# Altium PCB PCB4.PcbDoc
Units mm, origin at the board's own origin, x right, y up, seen from the top; angles counter-clockwise.
Board outline 40 x 20 mm, 2 copper layers (Top Layer, Bottom Layer); 17 components, 13 nets, 57 pads, 1 vias.
Unrouted connection lines stored in the file: 4.
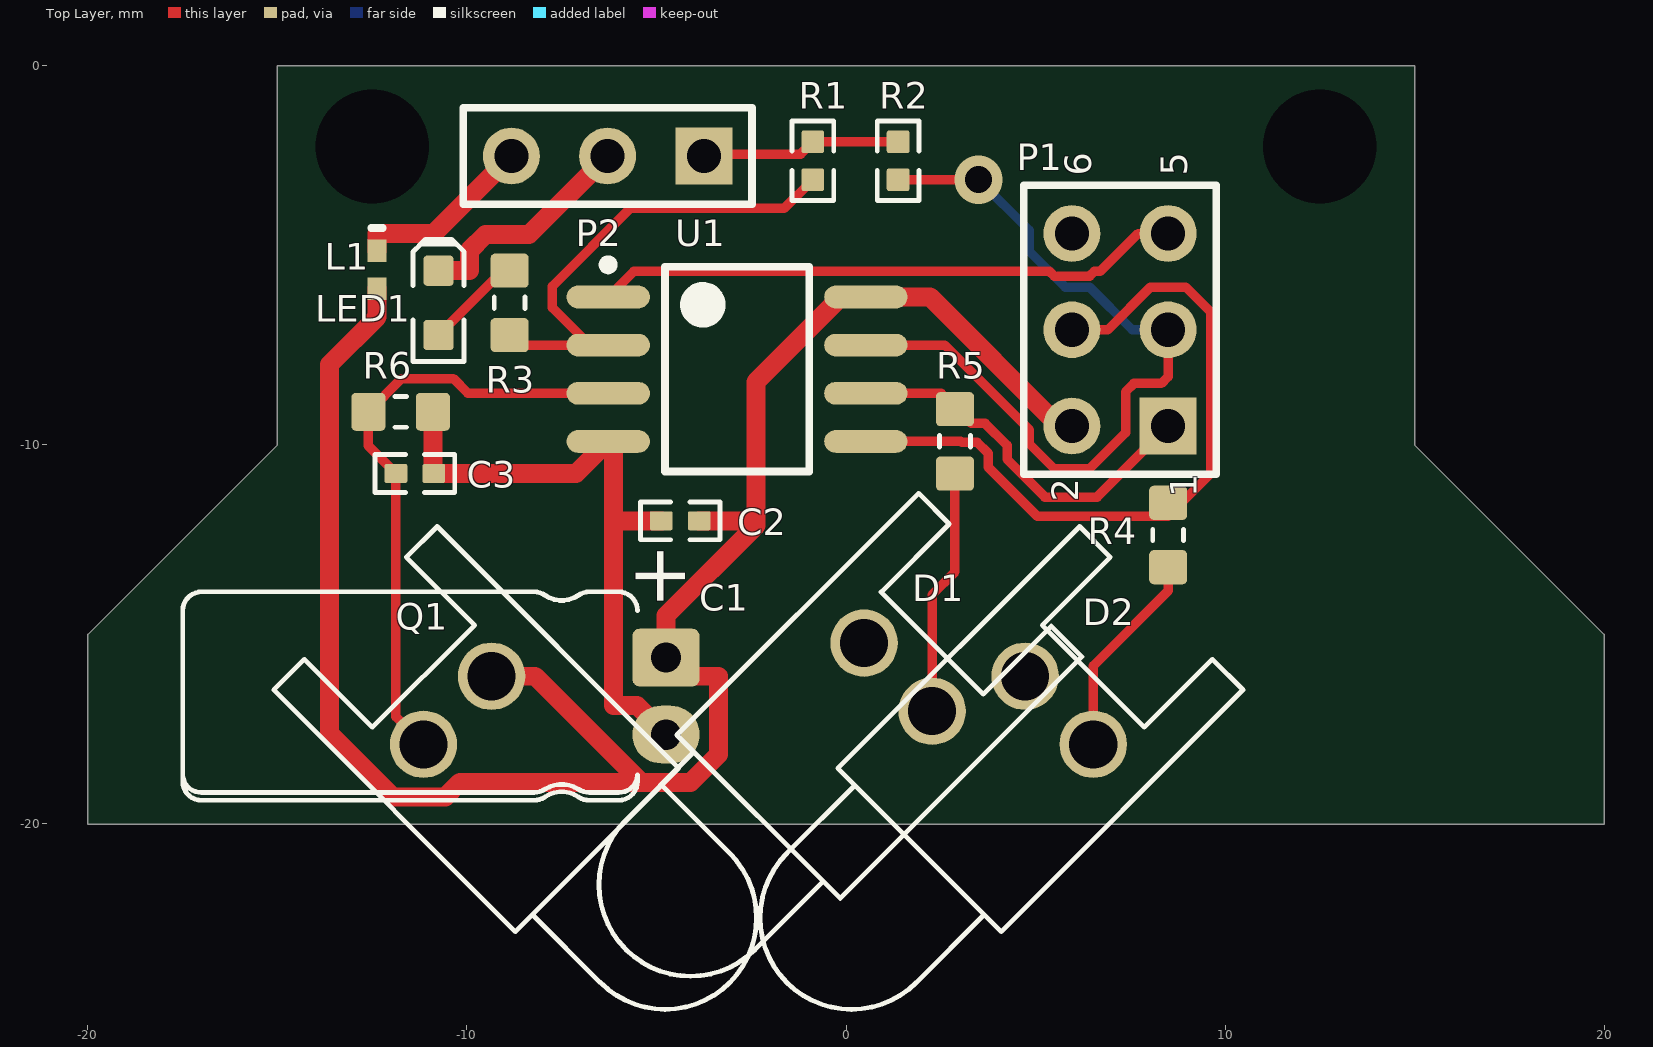
[diagram p0: Top Layer view]
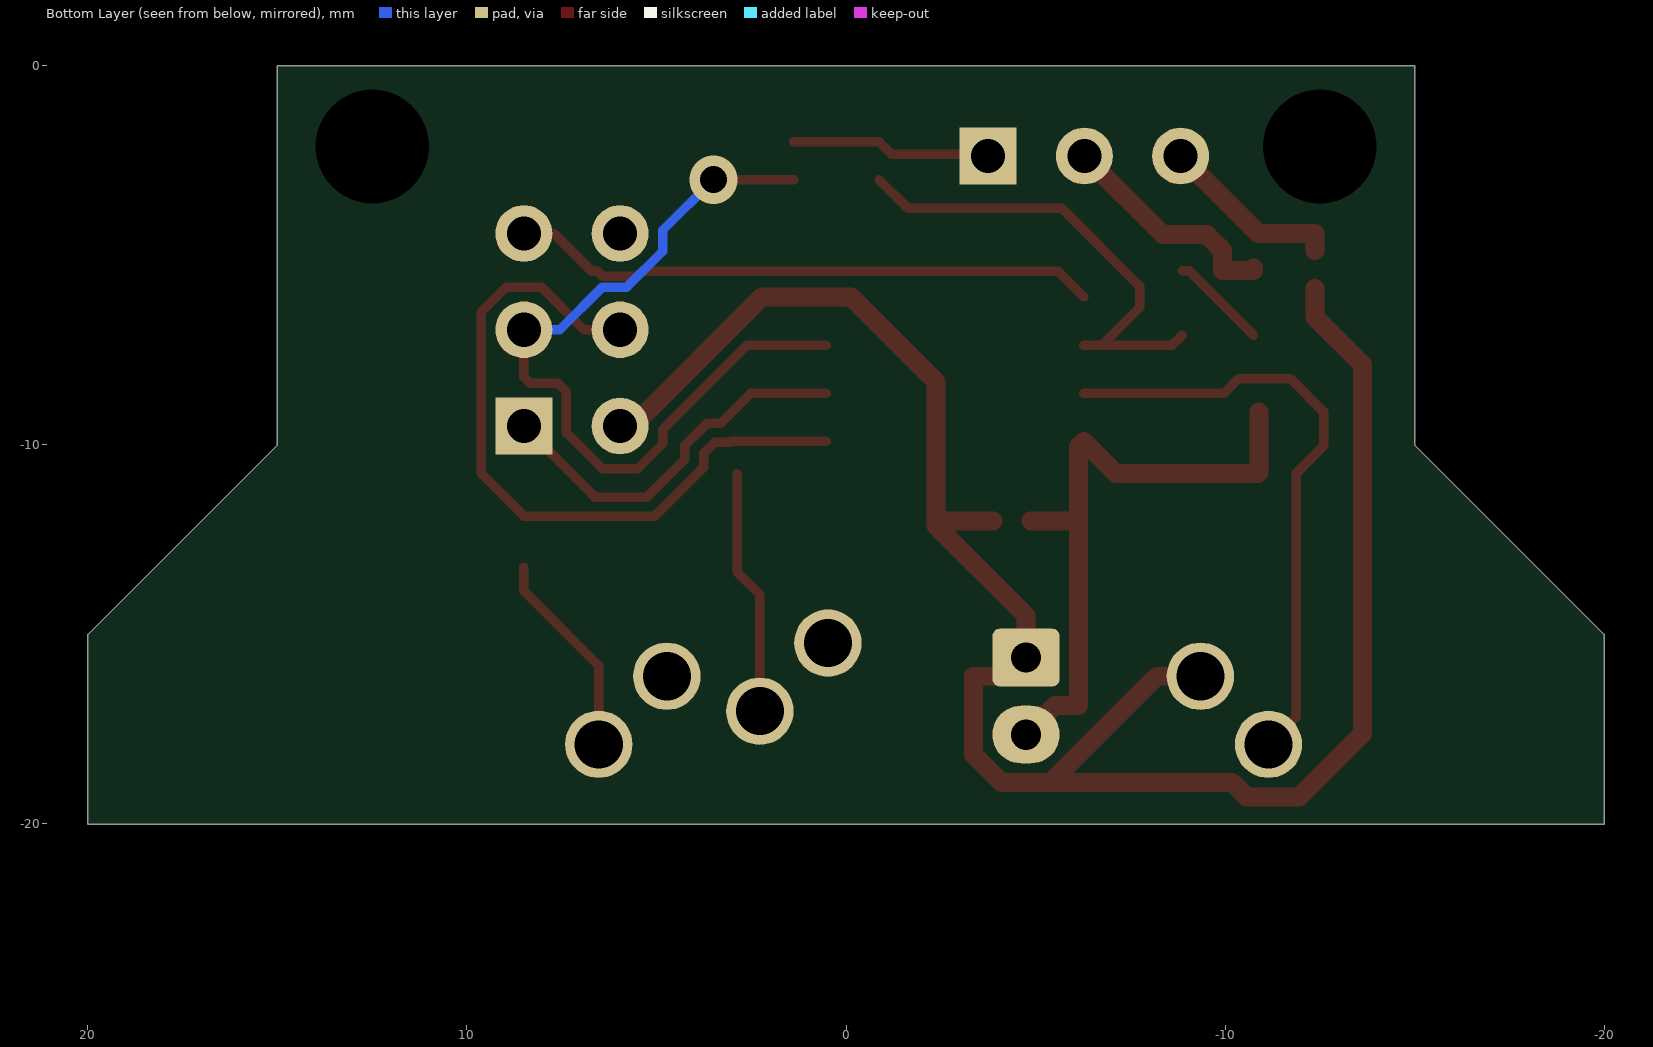
[diagram p1: Bottom Layer view, seen from below]
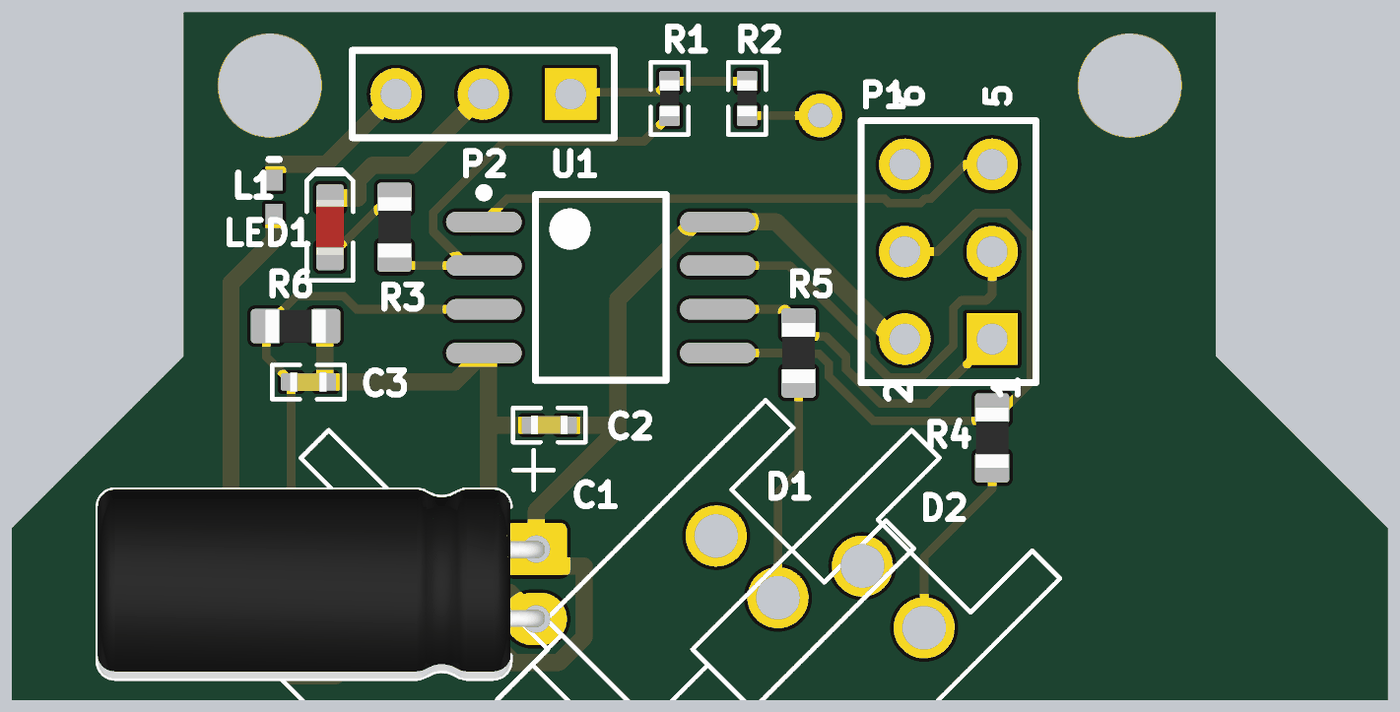
[diagram p2: 3D render of the assembled board from above, using the file's embedded part models]

## Layer stack, top to bottom
Top Solder: solder mask 0.0102, Solder Resist, Dk 3.5
Top Layer: signal copper 0.0356
Dielectric1: dielectric 0.32, FR-4, Dk 4.8
Bottom Layer: signal copper 0.0356
Bottom Solder: solder mask 0.0102, Solder Resist, Dk 3.5

## Board outline
-15,0 15,0 15,-10 20,-15 20,-20 -20,-20 -20,-15 -15,-10 -15,0

## Design rules (kind name [scope] priority, off if disabled: settings)
Clearance [All] p1: gap=0.25
FabricationTestPointUsage TestPointUsage [All] p1: valid=0 allowmultiple=FALSE
FabricationTestpoint Testpoint [All] p1: side=3 testpointundercomponent=TRUE minsize=1.016 maxsize=2.54 preferedsize=1.524 minholesize=0 maxholesize=1.016 preferedholesize=0.813 testpointgrid=0.025 allowsidetop=TRUE allowsidebottom=TRUE usegrid=TRUE gridtolerance=0
PolygonConnect [All] p1: connectstyle=Relief reliefconductorwidth=0.254 reliefentries=4 polygonreliefangle="90 Angle" airgapwidth=0.254
RoutingVias [All] p1: holewidth=0.6 width=1 viastyle="Through Hole" minholewidth=0.6 minwidth=1 maxholewidth=0.6 maxwidth=1
SilkToSolderMaskClearance SilkscreenOverComponentPads [IsPad] p1: minsilkscreentomaskgap=0.254 clearancetoexposedcopper=TRUE
SolderMaskExpansion [All] p1: expansion=0.102
Width Width_Power [(InNet('5V') OR InNet('GND') OR InNet('VCC'))] p1: maxlimit=0.5 minlimit=0.25 preferedwidth=0.5 minimp=50.000000 maximp=50.000000 favimp=50.000000
Width [All] p2: maxlimit=0.25 minlimit=0.2 preferedwidth=0.25 minimp=50.000000 maximp=50.000000 favimp=50.000000
27 further rules are at their usual default settings.

## Components (designator, comment, footprint, x,y, rotation, side; value= is the part's Value field where it differs from the comment)
C1 "100µ" CAPAE200P550X1200_FLAT2 -4.75,-16.625 r90 top
C2 "100n" CAPC1005X55N -4.375,-12 r0 top
C3 "1n" CAPC1005X55N -11.375,-10.75 r0 top
D1 "GL480E" LED-0 1.375,-16.125 r315 top
D2 "GL480E" LED-0 5.625,-17 r315 top
L1 "Inductor" 0402-A -12.375,-5.375 r270 top
LED1 "Red" LED-0603-RED -10.75,-6.25 r90 top
P1 "ICSP" HDR2X3 8.5,-9.5 r90 top
P2 "Header 3" HDR1X3 -3.75,-2.375 r180 top
Q1 "SFH3100F" LED-0 -10.25,-17 r45 top
R1 "Thick Film" RESC1005X40N -0.875,-2.5 r90 top
R2 "Thick Film" RESC1005X40N 1.375,-2.5 r90 top
R3 "Thick Film" RESC1608X55N -8.875,-6.25 r90 top
R4 "Thick Film" RESC1608X55N 8.5,-12.375 r90 top
R5 "Thick Film" RESC1608X55N 2.875,-9.905 r90 top
R6 "Thick Film" RESC1608X55N -11.75,-9.125 r180 top
U1 "ATtiny45-20SH" 8S2_N -2.875,-8 r0 top

## Footprints (in the part's own frame and the unit in brackets; to place one, negate y for a bottom-side part, rotate by r counter-clockwise, add the part's x,y. Pads: shape width x height; smd on the part's side, far side on the other; paste and mask are expansions set on the pad)
8S2_N [mm] "SOP, 8-Leads, Body 5.3x5.3mm, Pitch 1.27mm, IPC Medium Density"
  oval 2.2x0.6 smd: 1(-3.4,1.905) 2(-3.4,0.635) 3(-3.4,-0.635) 4(-3.4,-1.905) 5(3.4,-1.905) 6(3.4,-0.635) 7(3.4,0.635) 8(3.4,1.905)
  silkscreen extent -3.52,-2.7 1.9,2.88, body extent -2.7,-2.68 2.7,2.68, height 2.16
0402-A [mm] "Chip Inductor, Body 1.0x0.5mm, IPC High Density"
  rect 0.6x0.5 smd: 1(-0.5,0) 2(0.5,0)
  silkscreen extent -1.1,-0.15 -1.1,0.15, body extent -0.55,-0.3 0.55,0.3, height 0.55
CAPAE200P550X1200_FLAT2 [mil]
  round 20 on Mech15: 0(0,0)
  rrect25% 60x70 hole 31.5: 1(40,0)
  oval 60x70 hole 31.5: 2(-40,0)
  silkscreen extent -108,30 108,502, body extent -107,-10 107,502, height 216
CAPC1005X55N [mm] "Chip Capacitor, Body 1.0x0.5mm, EIA 0402, IPC Medium Density"
  round 0.2 on Mech15: 0(0,0)
  rrect20% 0.6x0.5 smd: 1(-0.5,0) 2(0.5,0)
  Top Layer pour cut-out: -0.325,0.375 -0.2,0.5 0.2,0.5 0.325,0.375 0.325,-0.375 0.2,-0.5 -0.2,-0.5 -0.325,-0.375
  silkscreen extent -1.05,-0.5 1.05,0.5, body extent -0.52,-0.27 0.53,0.28, height 0.55
HDR1X3 [mm] "Connector; Header; 3 Position"
  rect 1.5x1.5 hole 0.9: 1(0,0)
  round 1.5 hole 0.9: 2(2.54,0) 3(5.08,0)
  silkscreen extent -1.27,-1.27 6.35,1.27
HDR2X3 [mm] "Connector; Header; 3x2 Position"
  rect 1.5x1.5 hole 0.9: 1(0,0)
  round 1.5 hole 0.9: 2(0,2.54) 3(2.54,0) 4(2.54,2.54) 5(5.08,0) 6(5.08,2.54)
  silkscreen extent -1.27,-1.27 6.35,3.81
LED-0 [mil] "LED; 2 Leads"
  round 70 hole 50: 1(50,0) 2(-50,0)
  silkscreen extent -120,-400 120,150
LED-0603-RED [mm]
  round 0.254 on Mech15: 0(0,0)
  rrect25% 0.8x0.8 smd: A(-0.85,0) K(0.85,0)
  Top Layer pour cut-out: -0.5,0.5 0.5,0.5 0.5,-0.5 -0.5,-0.5
  silkscreen extent -1.55,-0.67 1.68,0.67, body extent -0.8,-0.4 0.8,0.4, height 0.75
RESC1005X40N [mm] "Chip Resistor, Body 1.0x0.5mm, EIA 0402, IPC Medium Density"
  round 0.2 on Mech15: 0(0,0)
  rrect20% 0.6x0.6 smd: 1(-0.5,0) 2(0.5,0)
  Top Layer pour cut-out: -0.325,0.375 -0.2,0.5 0.2,0.5 0.325,0.375 0.325,-0.375 0.2,-0.5 -0.2,-0.5 -0.325,-0.375
  silkscreen extent -1.05,-0.55 1.05,0.55, body extent -0.52,-0.27 0.53,0.28, height 0.4
RESC1608X55N [mm] "Chip Resistor, Body 1.6x0.8mm, EIA 0603, IPC Medium Density"
  round 0.254 on Mech15: 0(0,0)
  rrect25% 0.9x1 smd: 1(-0.85,0) 2(0.85,0)
  Top Layer pour cut-out: -0.6,0.5 -0.4,0.7 0.4,0.7 0.6,0.5 0.6,-0.5 0.4,-0.7 -0.4,-0.7 -0.6,-0.5
  silkscreen extent -0.15,-0.41 0.15,0.41, body extent -0.87,-0.47 0.88,0.48, height 0.54

## Part data
C1: library part CAPE_100u_16V_THD, "Capacitor THD Electrolytic 100uF 20% 16V Radial"
C2: library part CAPC_100n_0402_X5R_16V_10%, "Capacitor SMD Cer 100nF 10% 16V X5R 0402"
C3: library part CAPC_1n_0402_X7R_16V_10%, "Capacitor SMD Cer 1nF 10% 16V X7R 0402"
D1 D2: library part LED0, "Typical INFRARED GaAs LED"
LED1: library part LED_SMD_Red_0603_220mcd, "LED 0603 SMD Hyper Red 630nm 220mcd 20mA"
P1: library part "Header 3X2", "Header, 3-Pin, Dual row"
P2: "Header, 3-Pin"
Q1: library part LED0, "IR Phototransistor"
R1 R2: library part RES_10K_0402_1%, "Resistor SMD chip 10k Ohm 0.063W 1% 0402"
R3: library part RES_330R_0603_5%, "Resistor SMD chip 330 Ohm 0.1W 5% 0603"
R4 R5 R6: library part RES_2K2_0603_5%, "Resistor SMD chip 2.2k Ohm 0.1W 5% 0603"
U1: "8-bit AVR Microcontroller, 20MHz, 2.7-5.5V, 4K Flash, 256 Bytes EEPROM, 256 Bytes SRAM, Industrial Grade (-40°C to 85°C), 8-Lead SOIC, Pb-Free"

## Free pads (board coordinates)
  round 1.524 hole 3: 2(-12.5,-2.125) 2(12.5,-2.125)

## Via types
v1: diameter 1.27, hole 0.711, Top Layer to Bottom Layer, 1 vias

## Nets (pads, with @x,y where several pads share a name; then routed paths per layer and width w, separated by ;. In a path a pad name is that pad's centre, name@x,y a point inside that pad or via, vN(x,y) a via of type N, cw(c..) or ccw(c..) an arc to the next point about the centre after c; other vN are vias at no path point)
5V: C1.1 C2.2 L1.2 P1.2 Q1.1 U1.8 | length 53.9
  Top Layer w0.5: L1.2 -12.375,-6.625 -13.625,-7.875 -13.625,-17.625 -11.963,-19.287 -10.573,-19.287 -10.189,-18.903 -5.4,-18.903 ; Q1.1 -8.201,-16.102 -5.4,-18.903 ; C2.2 -2.5,-12 -2.375,-12.125 ; P1.2 5.625,-9.5 2.22,-6.095 U1.8 -0.136,-6.095 -2.375,-8.334 -2.375,-12.125 ; -5.4,-18.903 -4.1,-18.903 -3.361,-18.164 -3.361,-16.102 -5.243,-16.102 C1.1 -4.75,-14.5 -2.375,-12.125
GND: C1.2 C2.1 C3.2 D1.2 D2.2 LED1.K P1.6 P2.2 R6.1 U1.4 | length 22.7
  Top Layer w0.5: R6.1 -10.9,-10.725 C3.2 -7.12,-10.75 U1.4 -6.139,-10.041 -6.139,-12 ; LED1.K@-10.75,-5.335 LED1.K -9.934,-5.4 -9.934,-4.868 -9.516,-4.45 -8.365,-4.45 P2.2 ; C2.1 -6.139,-12 ; C1.2 -5.52,-16.871 -6.139,-16.871 -6.139,-12
NetC3_1: C3.1 Q1.2 R6.2 U1.3 | length 16.2
  Top Layer w0.25: Q1.2 -11.875,-17.171 C3.1 -12.6,-10.025 R6.2 -11.725,-8.25 -10.361,-8.25 -9.976,-8.635 U1.3
NetD1_1: D1.1 R5.1 | length 6.5
  Top Layer w0.25: D1.1 2.273,-13.952 2.875,-13.35 R5.1
NetD2_1: D2.1 R4.1 | length 5.5
  Top Layer w0.25: D2.1 6.523,-15.827 8.5,-13.85 R4.1
NetLED1_A: LED1.A R3.2 | length 2.6
  Top Layer w0.25: LED1.A -9.05,-5.4 R3.2
NetP1_1: P1.1 R5.2 U1.6 | length 10.1
  Top Layer w0.25: U1.6 2.51,-8.635 3.305,-9.43 3.672,-9.43 4.25,-10.008 4.25,-10.375 5.25,-11.375 6.625,-11.375 P1.1
NetP1_3: P1.3 R2.1 U1.7 | length 21.5
  Top Layer w0.25: U1.7 2.606,-7.365 4.835,-9.594 4.835,-9.966 5.494,-10.625 6.426,-10.625 7.375,-9.676 7.375,-8.595 7.595,-8.375 8.322,-8.375 8.5,-8.197 P1.3 ; R2.1 v1(3.5,-3)
  Bottom Layer w0.25: v1(3.5,-3) 4.835,-4.335 4.835,-4.886 5.784,-5.835 6.426,-5.835 7.551,-6.96 P1.3
NetP1_4: P1.4 R4.2 U1.5 | length 19.7
  Top Layer w0.25: U1.5 3.03,-9.905 3.055,-9.93 3.464,-9.93 3.75,-10.216 3.75,-10.582 5.043,-11.875 8.5,-11.875 9.625,-10.75 9.625,-6.494 8.966,-5.835 8.034,-5.835 6.909,-6.96 P1.4 P1.4@5.96,-7.375
NetP1_5: P1.5 U1.1 | length 15.6
  Top Layer w0.25: U1.1 -5.6,-5.42 5.369,-5.42 5.494,-5.545 6.426,-5.545 6.551,-5.42 6.705,-5.42 7.705,-4.42 P1.5
NetR1_1: R1.1 R3.1 U1.2 | length 12.7
  Top Layer w0.25: R3.1 -8.61,-7.365 U1.2@-6.76,-7.365 ; U1.2 U1.2@-6.76,-7.365 ; R1.1 -1.625,-3.75 -5.685,-3.75 -7.75,-5.815 -7.75,-6.375 U1.2@-6.76,-7.365
SIG: P2.1 R1.2 R2.2 | length 5.3
  Top Layer w0.25: P2.1 -3.75,-2.325 -1.2,-2.325 R1.2 R2.2
VCC: L1.1 P2.3 | length 4.8
  Top Layer w0.5: L1.1 -12.375,-4.42 -10.875,-4.42 P2.3
pads on no net: C1.0 C2.0 C3.0 LED1.0 R1.0 R2.0 R3.0 R4.0 R5.0 R6.0

## Silkscreen, mask and mechanical layers (free items; w line width, h text height)
Mechanical 16:
  drawing of 1874 lines, arcs and shapes, not listed
  text "1" at -113.129,79.611 h0.7
  text "2" at -40.485,79.611 h0.7
  text "3" at 32.667,79.611 h0.7
  text "4" at 105.565,79.611 h0.7
  text "A" at -147.47,56.599 h0.7
  text "A" at 139.55,56.599 h0.7
  text "B" at -147.47,8.542 h0.7
  text "B" at 139.55,8.542 h0.7
  text "C" at -147.47,-39.972 h0.7
  text "C" at 139.55,-39.972 h0.7
  text "ENGINEER:" at 24.615,-76.98 h0.7
  text "TITLE:" at 62.715,-76.98 h0.7
  text "PCB DESIGNER:" at 24.615,-84.473 h0.7
  text "D" at -147.47,-87.978 h0.7
  text "D" at 139.55,-87.978 h0.7
  text "DATE:" at 24.615,-92.22 h0.7
  text "PART NO.:" at 62.715,-92.22 h0.7
  text "REV:" at 116.055,-92.22 h0.7
  text "Altium Limited" at -8.405,-94.76 h0.7
  text ".PRINT_DATE" at 25.885,-95.268 h0.7
  text "12a Rodborough Rd" at -8.405,-97.3 h0.7
  text "Frenchs Forest" at -8.405,-99.84 h0.7
  text "FILE NAME:" at 24.615,-99.84 h0.7
  text "DWG NO:" at 62.715,-99.84 h0.7
  text "SCALE:" at 116.055,-99.84 h0.7
  text "NSW 2086" at -8.405,-102.38 h0.7
  text ".PCB_FILE_NAME_NO_PATH" at 25.885,-102.888 h0.7
  text "1" at -113.129,-108.349 h0.7
  text "2" at -40.485,-108.349 h0.7
  text "3" at 32.667,-108.349 h0.7
  text "4" at 105.565,-108.349 h0.7

## Text inside footprints (layer, text, board x,y; h text height)
C1: Top Overlay "+" at -4.242,-14.339 h1.52 r90
P1: Top Overlay "6" at 6.468,-2.896 h0.7 r90; Top Overlay "5" at 9.008,-2.896 h0.7 r90; Top Overlay "2" at 6.125,-11.5 h0.7 r90; Top Overlay "1" at 9.25,-11.375 h0.7 r90